# Altium PCB PCB_1A.pcbdoc
Units mil, origin at the board's own origin, x right, y up, seen from the top; angles counter-clockwise.
Board outline 3372.2 x 2584.8 mil, 2 copper layers (Top Layer, Bottom Layer); 64 components, 44 nets, 239 pads, 30 vias.
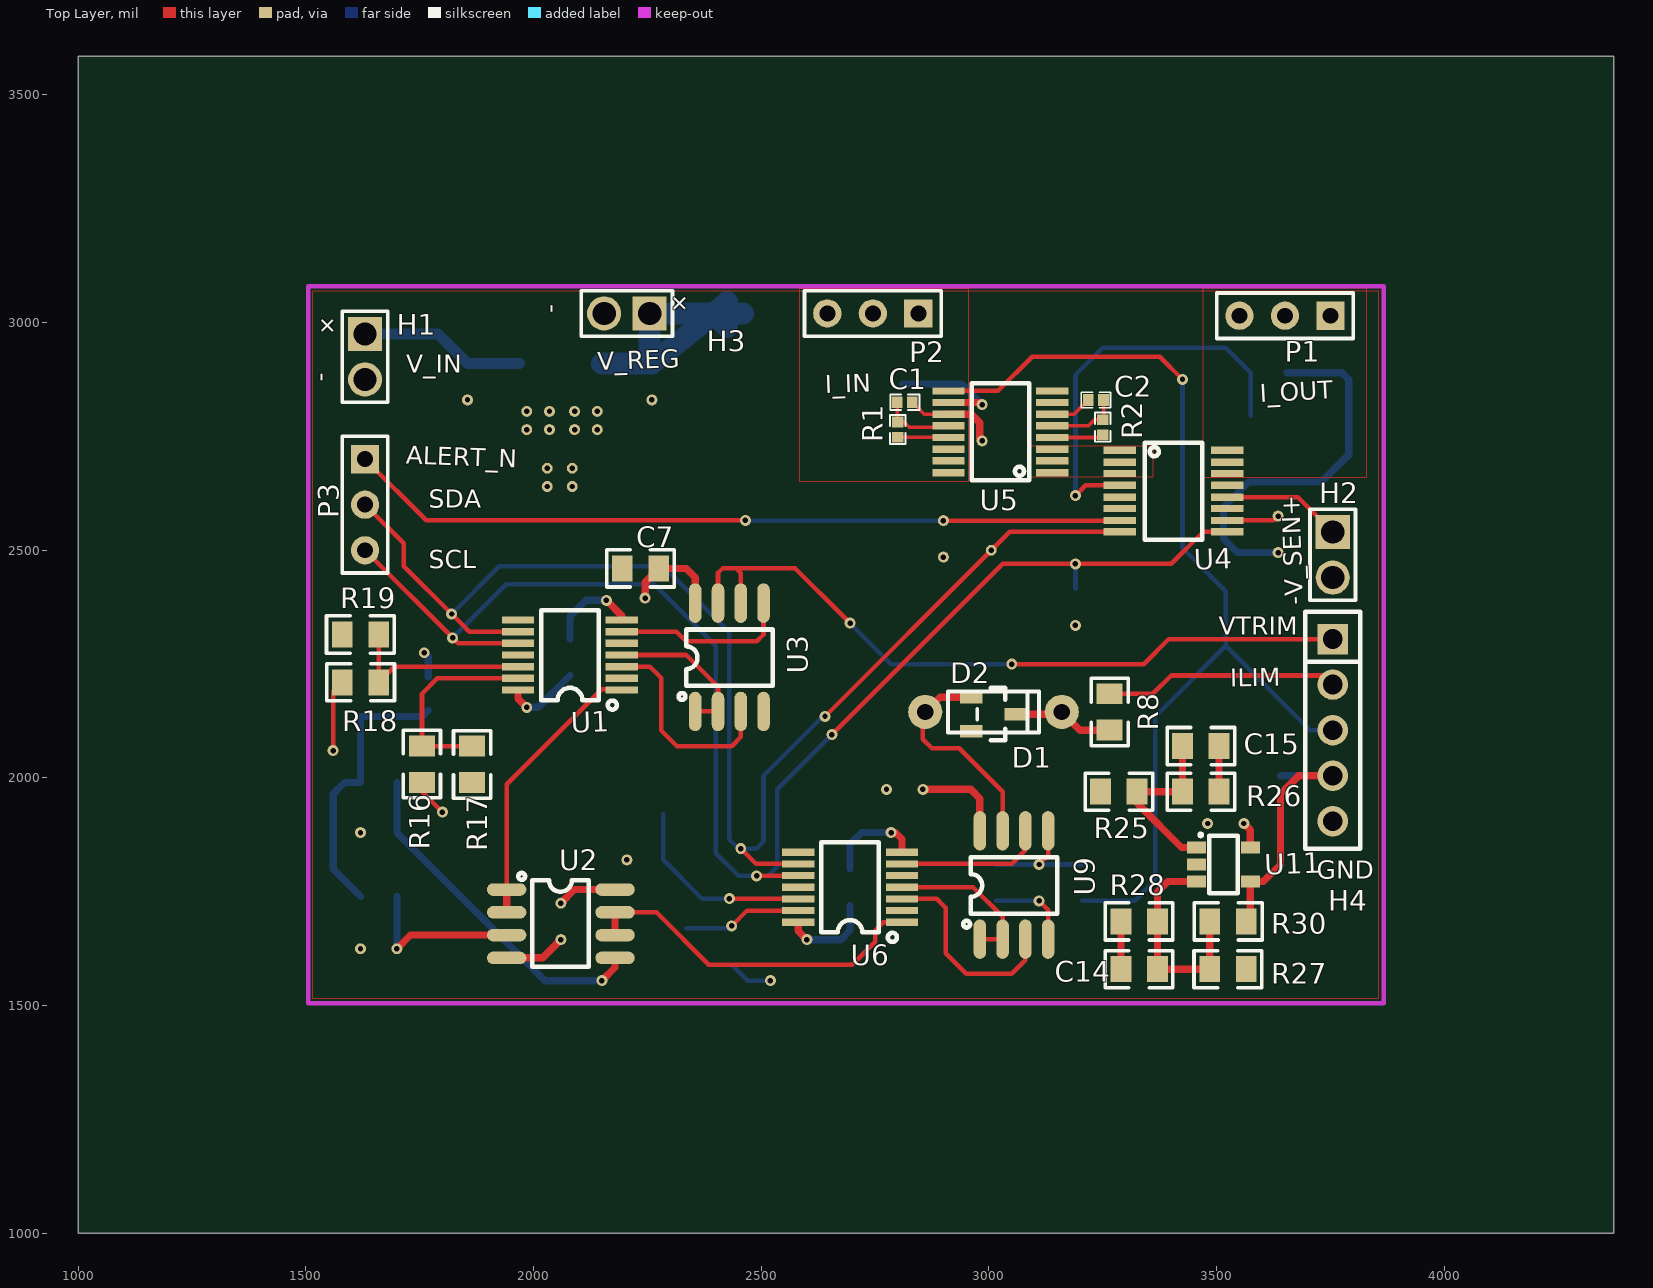
[diagram p0: Top Layer view]
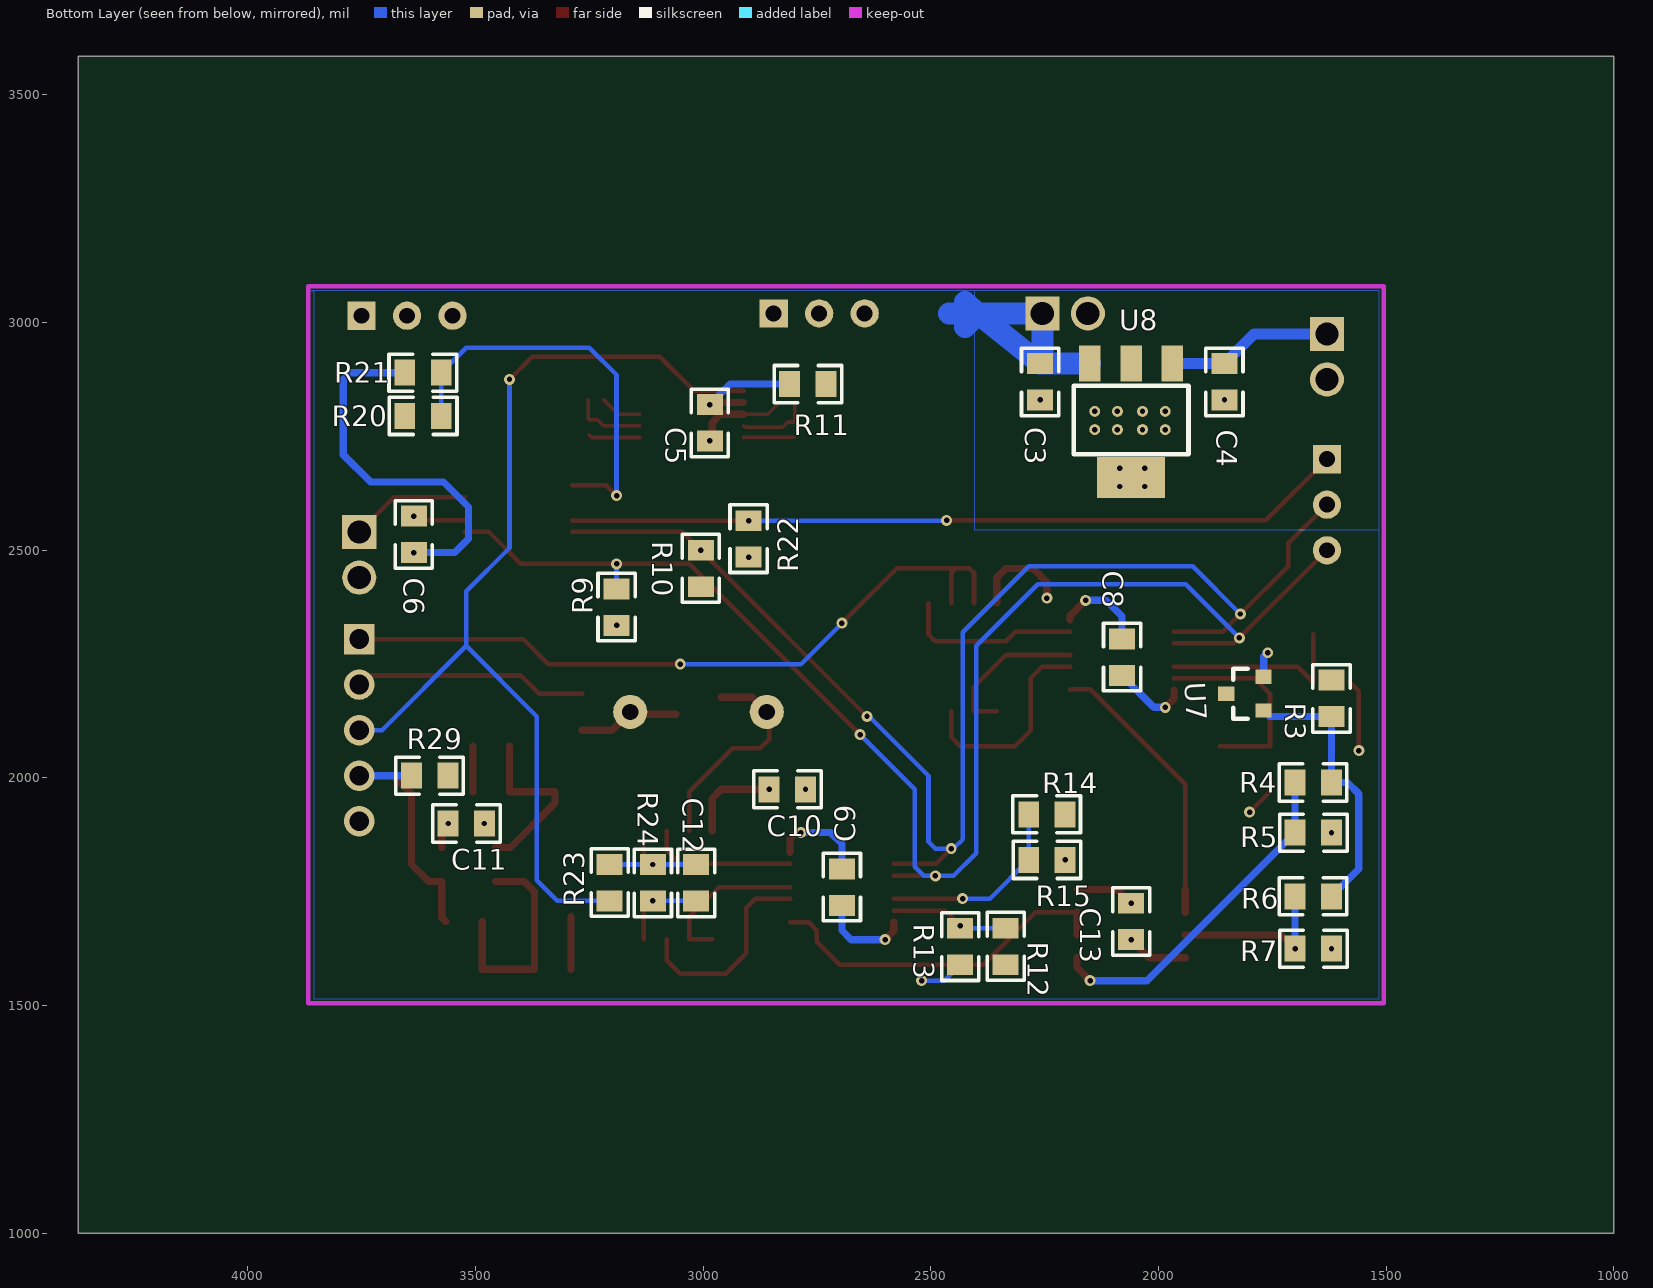
[diagram p1: Bottom Layer view, seen from below]

## Layer stack, top to bottom
Top Layer: signal copper (thickness not stored)
Dielectric: dielectric 12.6, FR-4, Dk 4.8
Bottom Layer: signal copper (thickness not stored)

## Board outline
4372.2,1000 1000,1000 1000,3584.8 4372.2,3584.8

## Components (designator, comment, footprint, x,y, rotation, side; value= is the part's Value field where it differs from the comment)
C1 "100nF" 0402 2815,2824.8 r180 top
C2 "100nF" 0402 3235,2829.8 r0 top
C3 "1u" 0805#1 2260,2869.8 r270 bottom
C4 "0.1u" 0805#1 1855,2869.8 r270 bottom
C5 "0.1u" 0805#1 2985,2779.8 r270 bottom
C6 "0.1u" 0805#1 3635,2534.8 r270 bottom
C7 "0.1u" 0805#2 2235,2459.8 r0 top
C8 "0.1u" 0805#1 2080,2264.8 r90 bottom
C9 "0.1u" 0805#1 2695,1759.8 r90 bottom
C10 "0.1u" 0805#1 2815,1974.8 r180 bottom
C11 "0.1u" 0805#1 3520,1899.8 r180 bottom
C12 "100nF" 0805#1 3015,1769.8 r270 bottom
C13 "0.1u" 0805#1 2060,1684.8 r270 bottom
C14 "0.1u" 0805#2 3330,1579.8 r0 top
C15 "0.1u" 0805#2 3465,2069.8 r180 top
D1 "BAS16-7-F" SOT-23(SOT-23-3) 3010,2139.8 r270 top
D2 "1N4148TA" DO-35 3010,2144.8 r0 top
H1 "Header-Male-2.54_1x2" HDR-2X1/2.54 1630,2924.8 r0 top
H2 "Header-Male-2.54_1x2" HDR-2X1/2.54 3755,2489.8 r0 top
H3 "Header-Male-2.54_1x2" HDR-2X1/2.54 2205,3019.8 r270 top
H4 "Header-Male-2.54_1x5" DIP-1X5P-2.54MM-M 3755,2104.8 r270 top
P1 "Header-Male-2.54_1x3" HDR-3X1/2.54 3650,3014.8 r180 top
P2 "Header-Male-2.54_1x3" HDR-3X1/2.54 2745,3019.8 r180 top
P3 "Header-Male-2.54_1x3" HDR-3X1/2.54 1630,2599.8 r270 top
R1 "10" 0402 2800,2764.8 r270 top
R2 "10" 0402 3250,2769.8 r270 top
R3 "1k" 0805#1 1620,2174.8 r270 bottom
R4 "1k" 0805#1 1660,1989.8 r0 bottom
R5 "1k" 0805#1 1660,1879.8 r180 bottom
R6 "1k" 0805#1 1660,1739.8 r0 bottom
R7 "1k" 0805#1 1660,1624.8 r180 bottom
R8 "100" 0805#2 3265,2144.8 r90 top
R9 "1k" 0805#1 3190,2374.8 r90 bottom
R10 "1k" 0805#1 3005,2459.8 r90 bottom
R11 "0" 0805#1 2770,2864.8 r180 bottom
R12 "1k" 0805#1 2335.39,1629.81 r90 bottom
R13 "1k" 0805#1 2435.39,1629.81 r270 bottom
R14 "1k" 0805#1 2245,1919.8 r0 bottom
R15 "1k" 0805#1 2245,1819.8 r180 bottom
R16 "1k" 0805#2 1755,2029.8 r270 top
R17 "1k" 0805#2 1865,2029.8 r90 top
R18 "1k" 0805#2 1620,2209.8 r180 top
R19 "1k" 0805#2 1620,2314.8 r0 top
R20 "1k" 0805#1 3615,2794.8 r180 bottom
R21 "1k" 0805#1 3615,2889.8 r0 bottom
R22 "1k" 0805#1 2900,2524.8 r90 bottom
R23 "10" 0805#1 3205,1769.8 r90 bottom
R24 "1k" 0805#1 3110,1769.8 r270 bottom
R25 "1k" 0805#2 3285,1969.8 r180 top
R26 "1k" 0805#2 3465,1969.8 r180 top
R27 "1k" 0805#2 3525,1579.8 r0 top
R28 "1k" 0805#2 3330,1684.8 r0 top
R29 "1k" 0805#1 3600,2004.8 r0 bottom
R30 "1k" 0805#2 3525,1684.8 r180 top
U1 "TPL0102-100PWR" TSSOP-14 2080,2269.8 r180 top
U2 "OPA2188AIDR" SOIC-8_150MIL 2060,1679.8 r0 top
U3 "OPA2188AIDR" SOIC-8_150MIL 2430,2264.8 r90 top
U4 "INA260AIPW" TSSOP-16#1 3405,2629.8 r0 top
U5 "INA250A3PWR" TSSOP-16#2 3025,2759.8 r180 top
U6 "TPL0102-100PWR" TSSOP-14 2695,1759.8 r180 top
U7 "LM4040C25MDBZTEP" SOT23-3 1810,2184.8 r270 bottom
U8 "LM2937IMP-5.0" SOT-223 2060,2784.8 r90 bottom
U9 "OPA2188AIDR" SOIC-8_150MIL 3055,1764.8 r90 top
U11 "TL331IDBVR" SOT-23-5 3515,1809.8 r0 top

## Footprints (in the part's own frame and the unit in brackets; to place one, negate y for a bottom-side part, rotate by r counter-clockwise, add the part's x,y. Pads: shape width x height; smd on the part's side, far side on the other; paste and mask are expansions set on the pad)
0402 [mm]
  rect 0.6x0.65 smd: 1(-0.424,0) 2(0.424,0)
  silkscreen extent -0.82,-0.43 0.81,0.43
0805#1 [mm]
  rect 1.16x1.45 smd: 1(1.016,0) 2(-1.016,0)
  silkscreen extent -1.87,-1.04 1.9,1.03
0805#2 [mm]
  rect 1.16x1.45 smd: 1(-1.016,0) 2(1.016,0)
  silkscreen extent -1.9,-1.03 1.87,1.04
DIP-1X5P-2.54MM-M [mm]
  rect 1.7x1.7 hole 1.1: 1(-5.08,0)
  round 1.7 hole 1.1: 2(-2.54,0) 3(0,0) 4(2.54,0) 5(5.08,0)
  silkscreen extent -6.6,-1.52 6.6,1.52
DO-35 [mil]
  round 75 hole 35.43: 1(-150,0) 2(150,0)
  silkscreen extent -100,-45 100,45
HDR-2X1/2.54 [mm]
  rect 1.9x1.9 hole 1.3: 1(0,1.27)
  round 1.9 hole 1.3: 2(0,-1.27)
  silkscreen extent -1.27,-2.54 1.27,2.54
HDR-3X1/2.54 [mil]
  rect 62x62 hole 35: 1(-100,0)
  round 62 hole 35: 2(0,0) 3(100,0)
  silkscreen extent -150,-50 150,50
SOIC-8_150MIL [mm]
  oval 2.2x0.7 smd: 1(-3.023,1.905) 2(-3.023,0.635) 3(-3.023,-0.635) 4(-3.023,-1.905) 5(3.023,-1.905) 6(3.023,-0.635) 7(3.023,0.635) 8(3.023,1.905)
  silkscreen extent -2.37,-2.41 1.55,2.83
SOT23-3 [mil]
  rect 31.5x35.4 smd: 1(37,41) 2(-37,41) 3(0,-41)
  silkscreen extent -55,-26 55,6
SOT-23(SOT-23-3) [mm]
  rect 0.7x1.25 smd: 1(-0.95,-1.25) 2(0.95,-1.25) 3(0,1.25)
  silkscreen extent -1.46,-0.9 1.46,0.65
SOT-23-5 [mm]
  rect 1.06x0.65 smd: 1(-1.5,0.95) 2(-1.5,0) 3(-1.5,-0.95) 4(1.5,-0.95) 5(1.5,0.95)
  silkscreen extent -1.33,-1.6 0.8,1.71
SOT-223 [mm]
  rect 2x1.2 smd: 1(3.175,-2.3) 2(3.175,0) 3(3.175,2.3)
  rect 2.3x3.8 smd: 4(-3.175,0)
  silkscreen extent -1.87,-3.2 1.93,3.2
TSSOP-14 [mil]
  rect 71x16 smd: 1(-114,76.77) 2(-114,51.18) 3(-114,25.59) 4(-114,0) 5(-114,-25.59) 6(-114,-51.18) 7(-114,-76.77) 8(114,-76.77) 9(114,-51.18) 10(114,-25.59) 11(114,0) 12(114,25.59) 13(114,51.18) 14(114,76.77)
  silkscreen extent -103,-98 63,120
TSSOP-16#1 [mil]
  rect 71x16 smd: 1(-118.11,89.5) 2(-118.11,63.5) 3(-118.11,38.5) 4(-118.11,12.5) 5(-118.11,-13.5) 6(-118.11,-38.5) 7(-118.11,-64.5) 8(-118.11,-89.5) 9(118.11,-89.5) 10(118.11,-64.5) 11(118.11,-38.5) 12(118.11,-13.5) 13(118.11,12.5) 14(118.11,38.5) 15(118.11,63.5) 16(118.11,89.5)
  silkscreen extent -63,-106 63,106
TSSOP-16#2 [mil]
  rect 71x16 smd: 1(-114,89.5) 2(-114,63.5) 3(-114,38.5) 4(-114,12.5) 5(-114,-13.5) 6(-114,-38.5) 7(-114,-64.5) 8(-114,-89.5) 9(114,-89.5) 10(114,-64.5) 11(114,-38.5) 12(114,-13.5) 13(114,12.5) 14(114,38.5) 15(114,63.5) 16(114,89.5)
  silkscreen extent -63,-107 63,107

## Free pads (board coordinates)
  round 24 hole 12: ""(1620,1624.8) ""(1620,1879.8) ""(1700,1624.8) ""(1855,2829.8) ""(1985,2764.8) ""(1985,2804.8) ""(2030,2639.8) ""(2030,2679.8) ""(2035,2764.8) ""(2035,2804.8) ""(2060,1644.8) ""(2060,1724.8) ""(2085,2639.8) ""(2085,2679.8) ""(2090,2764.8) ""(2090,2804.8) ""(2140,2764.8) ""(2140,2804.8) ""(2205,1819.8) ""(2260,2829.8) ""(2435,1674.8) ""(2900,2484.8) ""(2900,2564.8) ""(2985,2739.8) ""(2985,2819.8) ""(3005,2499.8) ""(3635,2494.8) ""(3635,2574.8)

## Via types
v1: diameter 24, hole 12, Top Layer to Bottom Layer, 30 vias

## Nets (pads, with @x,y where several pads share a name; then routed paths per layer and width w, separated by ;. In a path a pad name is that pad's centre, name@x,y a point inside that pad or via, vN(x,y) a via of type N, cw(c..) or ccw(c..) an arc to the next point about the centre after c; other vN are vias at no path point)
COMP_OUT: H4.4 R29.1 R30.1 U11.4 | length 574.4
  Top Layer w16: R30.1 3574.05,1693.85 U11.4 3602.6,1772.4 3640,1809.8 3640,1964.8 3680,2004.8 H4.4
  Bottom Layer w16: R29.1 H4.4
COMP_VM: C15.2 R25.1 R26.2 U11.1 | length 396.4
  Top Layer w16: C15.2 R26.2 R25.1 3325,1944.8 3330,1939.8 3422.6,1847.2 U11.1@3455.95,1847.2
COMP_VP: C14.2 R27.1 R28.2 R30.2 U11.3 | length 495.3
  Top Layer w16: R28.2 3370,1749.8 3390,1769.8 3392.6,1772.4 U11.3@3455.95,1772.4 ; R28.2@3370,1694.8 C14.2 R27.1 R30.2
CURRENT_IN: P2.1 P2.2 P2.3 U5.14 U5.15 U5.16
CURRENT_OUT: P1.1 P1.2 P1.3 U4.14 U4.15 U4.16
CURRENT_SENSE_AD_BRIDGE: U4.1 U4.2 U4.3 U5.1 U5.2 U5.3
CURRENT_SENSE_VOUT: H4.3 R23.2 U5.9 | length 2259.8
  Top Layer w10: U5.9 2911.5,2849.8 3020,2849.8 3095,2924.8 3130,2924.8 3375,2924.8 v1(3425,2874.8)
  Bottom Layer w10: R23.2 3320,1729.8 3365,1774.8 3365,2134.8 3520,2289.8 ; v1(3425,2874.8) 3425,2504.8 3520,2409.8 3520,2289.8 ; H4.3 3705,2104.8 3520,2289.8
CURRENT_SENSE_VOUT_R: C12.2 R23.1 R24.2 U9.5 | length 272.3
  Top Layer w10: v1(3110,1809.8) 3130,1829.8 U9.5
  Bottom Layer w10: C12.2 v1(3110,1809.8) R23.1
CURRENT_SENSOR_A1: R20.1 R21.2 U4.4 | length 898.8
  Top Layer w10: v1(3190,2619.8) 3212.5,2642.3 U4.4
  Bottom Layer w10: v1(3190,2619.8) 3190,2884.8 3250,2944.8 3520,2944.8 R21.2 R20.1
DCDC_VOUT_SENSE: H2.1 U4.12 | length 263.6
  Top Layer w10: U4.12 3678.5,2616.3 H2.1
DCDC_VREF_TRIM: H4.1 U3.6 U3.7 | length 1610.1
  Top Layer w10: U3.7 2405,2449.8 2415,2459.8 2445,2459.8 ; U3.6 2455,2449.8 2445,2459.8 ; v1(2695,2339.8) 2680,2354.8 2575,2459.8 2445,2459.8 ; v1(3050,2249.8) 3340,2249.8 3395,2304.8 H4.1
  Bottom Layer w10: v1(2695,2339.8) 2785,2249.8 v1(3050,2249.8)
GND: C1.1 C2.1 C3.1 C4.1 C5.1 C6.1 C7.1 C8.1 C9.1 C10.1 C11.1 C12.1 C13.1 C14.1 C15.1 H1.2 H2.2 H3.2 H4.5 pad.@1620,1624.8 pad.@1620,1879.8 pad.@1855,2829.8 pad.@1985,2764.8 pad.@1985,2804.8 pad.@2030,2639.8 pad.@2030,2679.8 pad.@2035,2764.8 pad.@2035,2804.8 pad.@2060,1644.8 pad.@2085,2639.8 pad.@2085,2679.8 pad.@2090,2764.8 pad.@2090,2804.8 pad.@2140,2764.8 pad.@2140,2804.8 pad.@2205,1819.8 pad.@2260,2829.8 pad.@2985,2739.8 pad.@3635,2494.8 R5.1 R7.1 R13.1 R15.1 R17.1 R19.1 R21.1 R24.1 R26.1 R28.1 U1.2 U1.5 U1.7 U1.8 U1.11 U2.4 U3.4 U4.5 U4.6 U4.11 U5.6 U5.7 U5.8 U5.11 U6.2 U6.5 U6.7 U6.8 U6.11 U7.2 U8.2 U8.4 U9.4 U11.2 | length 2242.5
  Top Layer w8: C1.1 2858.2,2798.3 U5.11 ; U5.6 3186.8,2798.3 C2.1
  Top Layer w10: v1(3110,1729.8) 3130,1709.8 U9.4
  Top Layer w16: U2.4 2020,1604.8 pad.@2060,1644.8 ; v1(2160,2389.8) 2194,2355.8 U1.7 ; v1(2785,1879.8) 2795,1879.8 2809,1865.8 U6.7 ; U5.11 2961.5,2798.3 2980,2779.8 2980,2744.8 pad.@2985,2739.8 ; C14.1 R28.1@3290,1694.8 ; R26.1 C15.1
  Bottom Layer w10: R13.1 2470.4,1554.8 v1(2520,1554.8) ; C12.1 v1(3110,1729.8)
  Bottom Layer w16: v1(1760,2274.8) 1769,2265.8 U7.2 ; C8.1 2080,2354.8 2115,2389.8 v1(2160,2389.8) ; C9.1 2695,1854.8 2720,1879.8 v1(2785,1879.8) ; C6.1 3545,2494.8 3515,2524.8 3515,2594.8 3570,2649.8 3730,2649.8 3790,2709.8 3790,2874.8 3775,2889.8 R21.1
  other v1: 3480,1899.8 2775,1974.8
I2C_SCL: P3.3 R9.1 U1.10 U4.9 U6.10 | length 3260.3
  Top Layer w10: P3.3 v1(1822.5,2307.3) 1834.41,2295.39 U1.10 ; v1(2490,1784.8) 2490.59,1785.39 U6.10 ; v1(2655,2094.8) 3030,2469.8 v1(3190,2469.8) 3275,2469.8 3400,2469.8 3470,2539.8 3470.5,2540.3 U4.9
  Bottom Layer w10: v1(1822.5,2307.3) 1940,2424.8 2265,2424.8 2400,2289.8 2400,2049.8 2400,1834.8 2450,1784.8 v1(2490,1784.8) 2515,1784.8 2535,1804.8 2535,1974.8 v1(2655,2094.8) ; R9.1 v1(3190,2469.8)
I2C_SDA: P3.2 pad.@3005,2499.8 R10.1 U1.9 U4.8 U6.9 | length 3027.5
  Top Layer w10: P3.2 1715,2514.8 1715,2464.8 v1(1820,2359.8) 1845,2334.8 1858.82,2320.98 U1.9 ; v1(2455,1844.8) 2488.82,1810.98 U6.9 ; v1(2640,2134.8) 3005,2499.8 3045.5,2540.3 U4.8
  Bottom Layer w10: v1(1820,2359.8) 1925,2464.8 2285,2464.8 2430,2319.8 2430,1864.8 2450,1844.8 v1(2455,1844.8) 2490,1844.8 2505,1859.8 2505,1989.8 2505,2004.8 2635,2134.8 v1(2640,2134.8)
ILIM_CTRL: D1.1 D2.1 U9.7 | length 484.9
  Top Layer w10: D2.1 2855,2139.8 2855,2084.8 2875,2064.8 2935,2064.8 3030,1969.8 U9.7
  Top Layer w16: D2.1 2892.4,2177.2 D1.1
ILIM_CTRL_A0: pad.@2435,1674.8 R12.1 R13.2 U6.13 | length 260
  Top Layer w10: pad.@2435,1674.8 2468.82,1708.62 U6.13
  Bottom Layer w10: R12.1 R13.2
ILIM_CTRL_A1: R14.1 R15.2 U6.12 | length 431.5
  Top Layer w10: v1(2430,1734.8) 2580.41,1734.8 U6.12
  Bottom Layer w10: R14.1 R15.2 2370,1734.8 v1(2430,1734.8)
ILIM_CTRL_D: D1.3 D2.2 R8.1 | length 224.4
  Top Layer w16: D1.3 3155,2139.8 D2.2 3200,2104.8 R8.1
ILIM_CTRL_R: H4.2 R8.2 | length 514.9
  Top Layer w10: R8.2 3360,2184.8 3400,2224.8 3735,2224.8 H4.2
ILIM_CTRL_WA: U6.3 U9.3 | length 456.1
  Top Layer w10: U6.3 2885.59,1734.21 2900,1719.8 2905,1714.8 2905,1614.8 2950,1569.8 3050,1569.8 3080,1599.8 U9.3
ILIM_CTRL_WA_BUF: U6.4 U9.1 U9.2 | length 346.9
  Top Layer w10: U6.4 2965,1759.8 3030,1694.8 U9.2 U9.1
ILIM_CTRL_WB: U6.6 U9.6 | length 326.2
  Top Layer w10: U6.6 3050,1810.98 3080,1840.98 U9.6
INA_ALERT_N: P3.1 pad.@2900,2564.8 R22.1 U4.7 | length 1713
  Top Layer w10: P3.1 1764.5,2565.3 v1(2465,2565.3) ; pad.@2900,2564.8 3286.39,2564.8 U4.7
  Bottom Layer w10: v1(2465,2565.3) 2465.5,2564.8 R22.1
INA_VS: C5.2 pad.@2985,2819.8 R11.2 U5.10 | length 269.5
  Top Layer w16: U5.10 2951.6,2824.3 2980.5,2824.3 pad.@2985,2819.8
  Bottom Layer w16: R11.2 2940,2864.8 C5.2
P5V0: C3.2 C6.2 C7.2 C8.2 C9.2 C10.2 C11.2 C13.2 H3.1 pad.@2060,1724.8 pad.@2900,2484.8 pad.@3635,2574.8 R3.2 R9.2 R10.2 R11.1 R12.2 R14.2 R16.2 R18.2 R20.2 R22.2 R29.2 U1.14 U2.8 U3.8 U4.10 U6.14 U8.3 U9.8 U11.5 | length 2089.7
  Top Layer w10: v1(1560,2059.8) 1560,2189.8 R18.2 ; R16.2 1755,1969.8 v1(1800,1924.8) ; U4.10 3625.5,2565.3 pad.@3635,2574.8
  Top Layer w16: U1.14 1966,2173.8 v1(1985,2154.8) ; pad.@2060,1724.8 2090,1754.8 U2.8 ; v1(2245,2394.8) 2245,2429.8 C7.2 2335,2459.8 2355,2439.8 U3.8 ; U6.14 2581,1663.8 v1(2600,1644.8) ; v1(2855,1974.8) 2960,1974.8 2980,1954.8 U9.8 ; v1(3560,1899.8) 3574.05,1885.76 U11.5
  Bottom Layer w16: v1(1985,2154.8) 2010,2154.8 C8.2 ; v1(2600,1644.8) 2675,1644.8 2695,1664.8 C9.2
  Bottom Layer w48: U8.3 C3.2 ; 2393.23,3019.8 2394,3019.8 2425,2989.8 2425,3044.8 2397.1,3019.8 C3.2 ; 2460,3019.8 H3.1 2255,2909.8 C3.2
  other v1: 3190,2334.8
S$15: 
S$17: 
S$21: 
S$23: 
SH_N_RC: R2.2 U5.4 | length 113.4
  Top Layer w8: U5.4 3244.2,2747.3 R2.2
SH_P_RC: R1.2 U5.13 | length 111.3
  Top Layer w8: R1.2 2910.2,2748.1 U5.13
VIN: C4.2 H1.1 U8.1 | length 366.4
  Bottom Layer w24: H1.1 1790,2974.8 C4.2 U8.1
VIN_N_RC: C2.2 R2.1 U5.5 | length 160.5
  Top Layer w8: U5.5 3218.5,2773.3 3230,2784.8 3231.7,2786.5 R2.1 3251.7,2788.2 C2.2
VIN_P_RC: C1.2 R1.1 U5.12 | length 161.3
  Top Layer w8: C1.2 2798.3,2783.2 R1.1 2813.3,2781.5 2825,2769.8 2907.5,2769.8 U5.12
VREF_I_LIMIT: U2.6 U2.7 U6.1 | length 780.9
  Top Layer w10: U2.7 2270,1704.8 2385,1589.8 2700,1589.8 2750,1639.8 2750,1664.8 2768.23,1683.03 U6.1
  Top Layer w16: U2.6 U2.7
VREF_SOURCE: R3.1 R4.2 R6.2 U7.1 | length 619.6
  Bottom Layer w16: R6.2 1560,1799.8 1560,1964.8 1585,1989.8 R4.2 R3.1 1756,2134.8 U7.1
VREF_V_STEER: U1.1 U2.1 U2.2 | length 621.3
  Top Layer w10: U2.1 1941,1985.8 2150,2194.8 2192.23,2194.8 U1.1
  Top Layer w16: U2.2 U2.1
VREFIN_I: R4.1 R5.2 U2.5 | length 756.6
  Top Layer w16: v1(2150,1554.8) 2179,1583.8 U2.5
  Bottom Layer w16: R4.1 R5.2 2025,1554.8 v1(2150,1554.8)
VREFIN_V: pad.@1700,1624.8 R6.1 R7.2 U2.3 | length 368.4
  Top Layer w16: pad.@1700,1624.8 1730,1654.8 U2.3
  Bottom Layer w16: R7.2 R6.1
VSTEER_A0: R16.1 R17.2 U1.13 | length 450
  Top Layer w10: R17.2 R16.1 1755,2184.8 1788.82,2218.62 U1.13
VSTEER_A1: R18.1 R19.2 U1.12 | length 425.3
  Top Layer w10: R19.2 R18.1 1694.41,2244.21 U1.12
VSTEER_WA: U1.3 U3.3 | length 464.9
  Top Layer w10: U1.3 2255.59,2244.21 2270,2229.8 2280,2219.8 2280,2104.8 2315,2069.8 2435,2069.8 2455,2089.8 U3.3
VSTEER_WA_BUF: U1.4 U3.1 U3.2 | length 344
  Top Layer w10: U1.4 2335,2269.8 2405,2199.8 U3.2 U3.1
VSTEER_WB: U1.6 U3.5 | length 395
  Top Layer w10: U1.6 2313.82,2320.98 2335,2299.8 2490,2299.8 2505,2314.8 U3.5
pads on no net: D1.2 R25.2 R27.2 U4.13 U7.3

## Polygon pours and split planes (outlines as drawn)
GND on Bottom Layer (solid): 1515,3069.8 2405,3069.8 2405,2544.8 1970,2544.8 1515,2544.8
P5V0 on Bottom Layer (solid): 1515,1514.8 1515,3069.8 3855,3069.8 3860,3069.8 3855,3069.8 3855,1514.8 1515,1514.8
CURRENT_SENSE_AD_BRIDGE on Top Layer (solid): 3085,2729.8 3215,2729.8 3360,2729.8 3360,2694.8 3360,2659.8 3215,2659.8 3085,2659.8 3085,2694.8
CURRENT_IN on Top Layer (solid): 2585,3074.8 2900,3074.8 2955,3074.8 2955,2859.8 2955,2649.8 2585,2649.8
CURRENT_OUT on Top Layer (solid): 3470,3074.8 3470,2659.8 3650,2659.8 3830,2659.8 3830,3074.8
GND on Top Layer (solid): 1515,3069.8 3855,3069.8 3855,1514.8 1515,1514.8

## Silkscreen, mask and mechanical layers (free items; w line width, h text height)
Top Overlay:
  text "+" at 2349.14,3037.55 h40 r135
  text "-" at 2055,3019.8 h40 r90
  text "+" at 1544.14,2964.26 h40 r45
  text "V_REG" at 2140.7,2894.82 h40 r2
  text "V_IN" at 1720,2889.8 h40
  text "-" at 1550,2869.8 h40 r90
  text "I_IN" at 2640.7,2844.82 h40 r2
  text "I_OUT" at 3596.05,2824.83 h40 r3
  text "ALERT_N" at 1719.3,2689.82 h40 r358
  text "SDA" at 1770,2593 h40
  text "SCL" at 1770,2459.8 h40
  text "-V_SEN+" at 3689.99,2380.5 h40 r92
  text "VTRIM" at 3505,2314.8 h40
  text "ILIM" at 3530.35,2199.81 h40 r1
  text "GND" at 3720,1778 h40